# Altium PCB uicc.PcbDoc
Units mm, origin at the board's own origin, x right, y up, seen from the top; angles counter-clockwise.
Board outline 152.4 x 101.6 mm, 2 copper layers (Top Layer, Bottom Layer); 76 components, 51 nets, 244 pads, 65 vias.
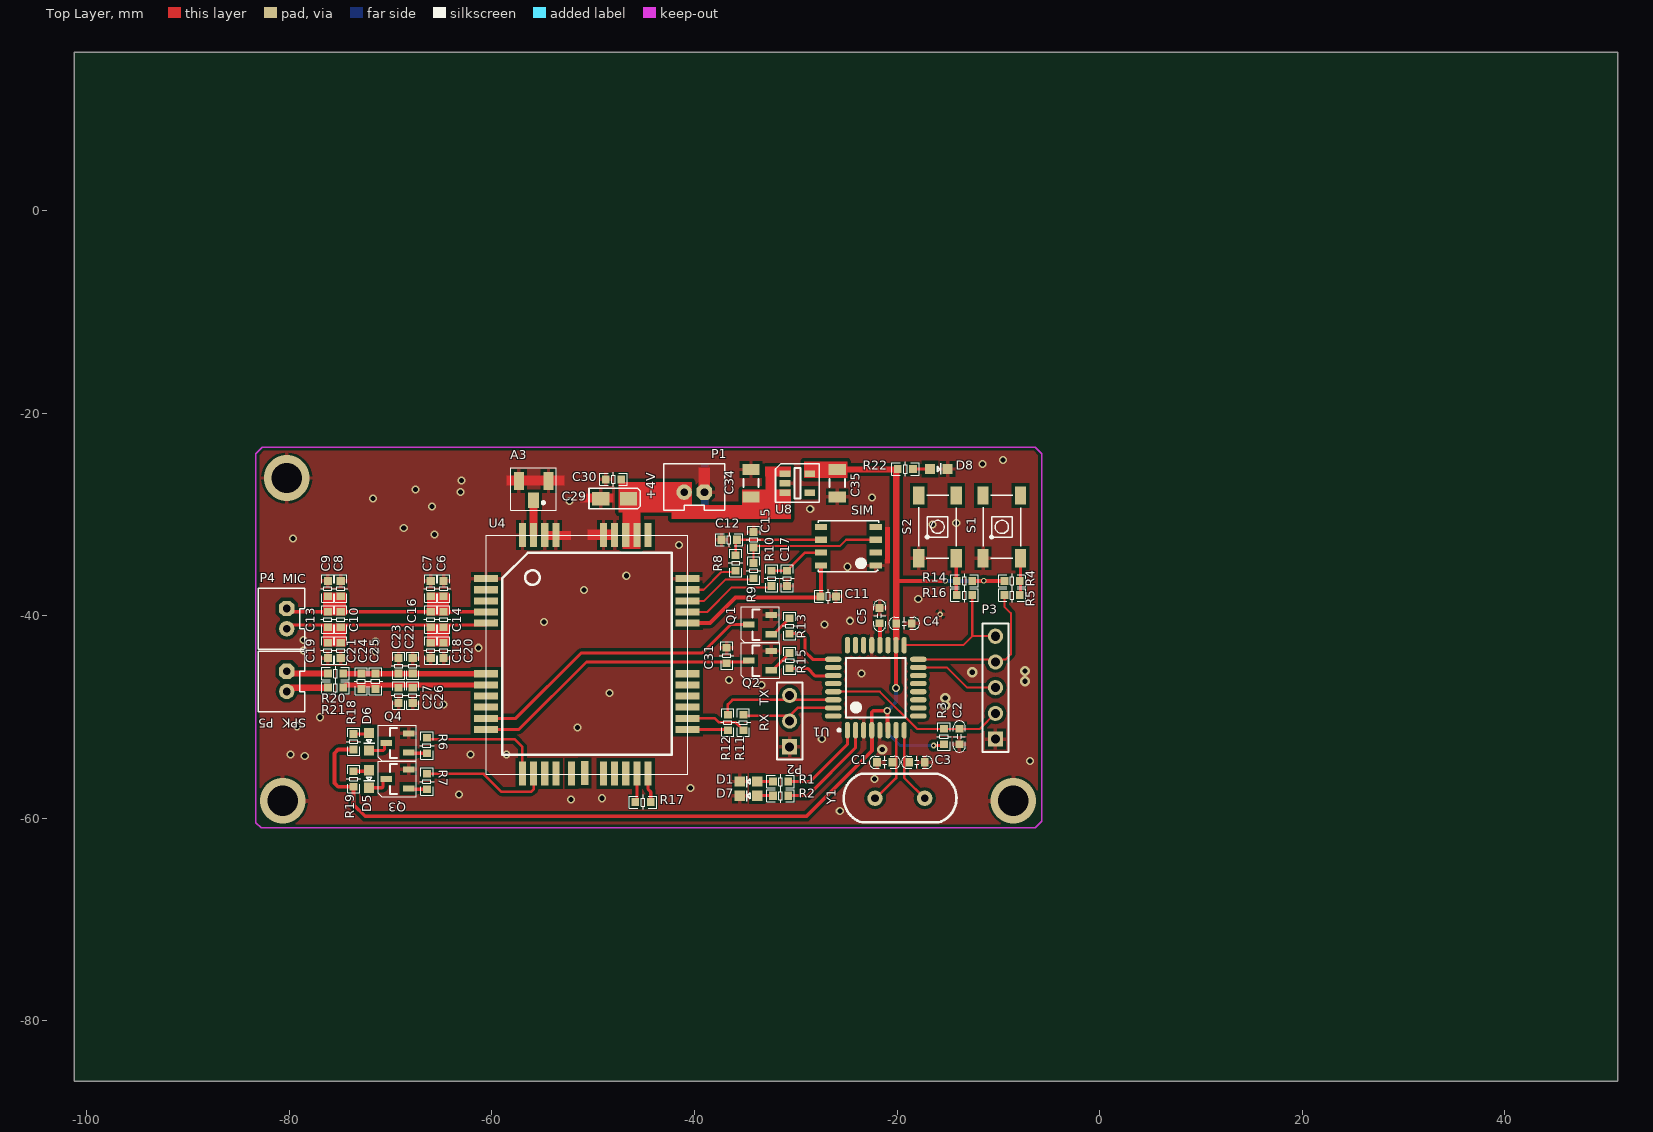
[diagram p0: Top Layer view]
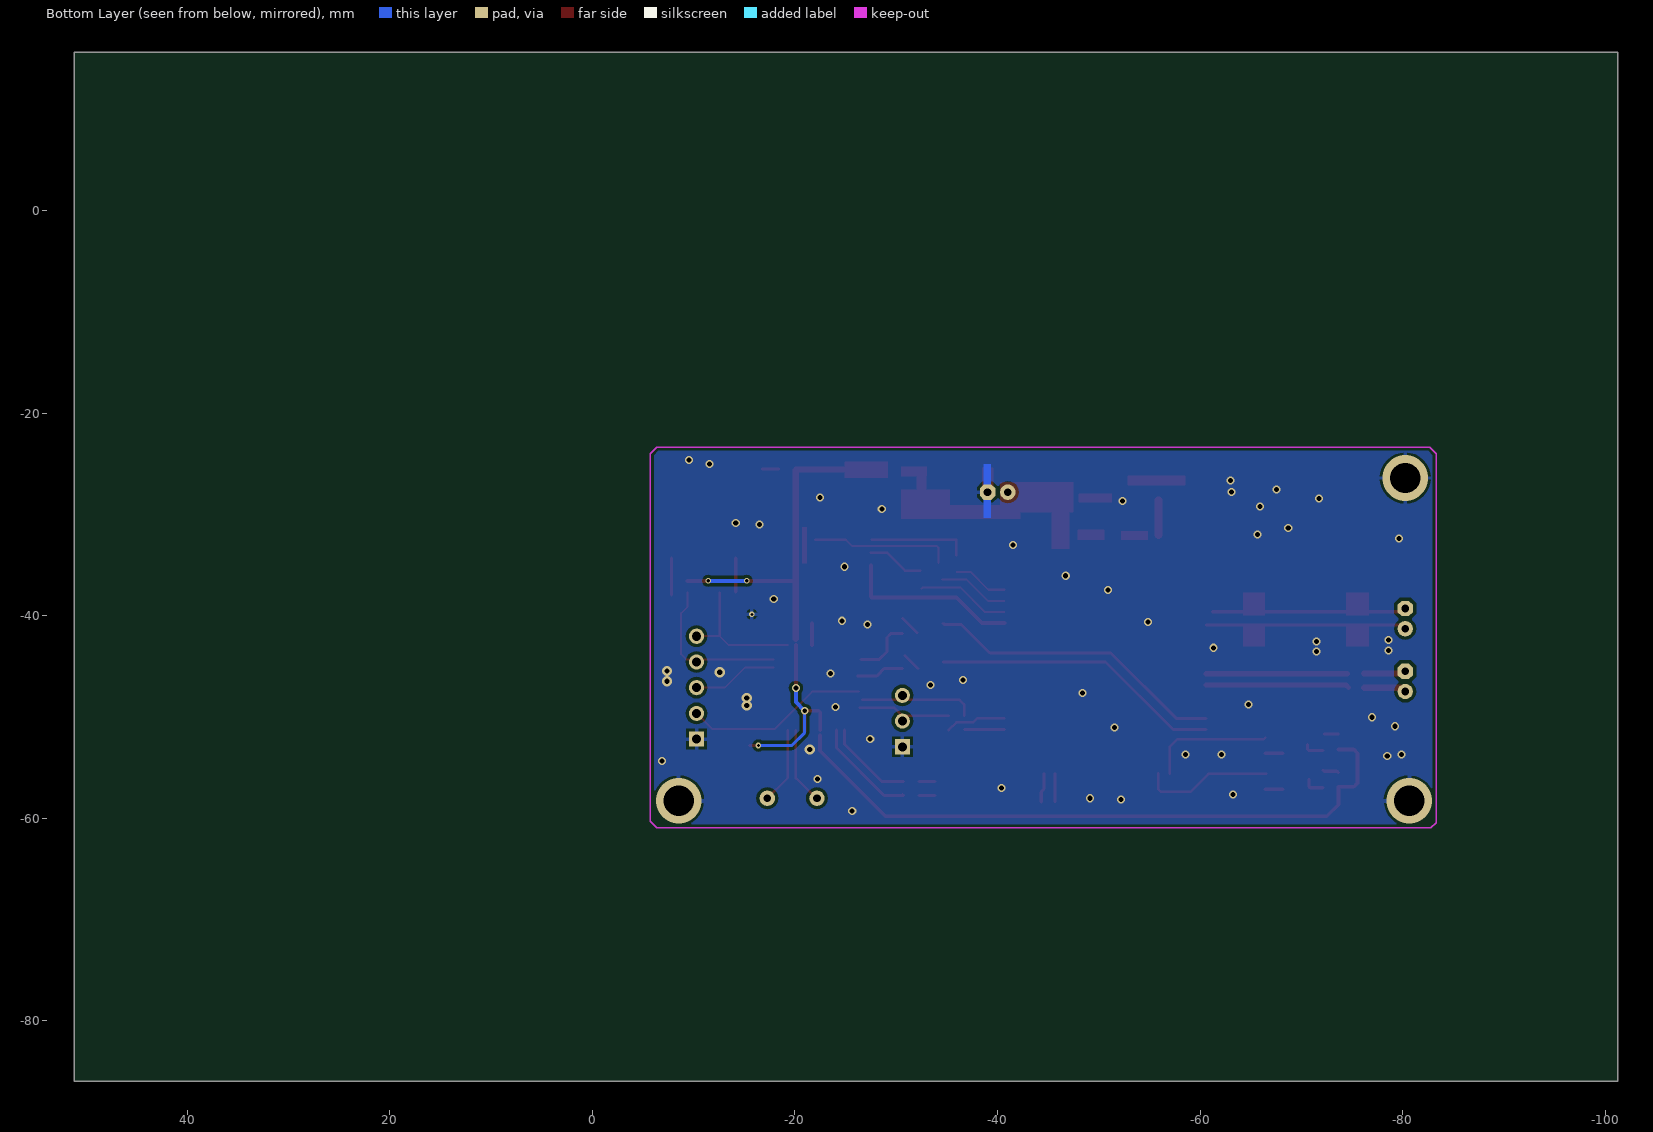
[diagram p1: Bottom Layer view, seen from below]

## Layer stack, top to bottom
Top Solder: solder mask 0.0102, Solder Resist, Dk 3.5
Top Layer: signal copper 0.0356
Dielectric1: dielectric 0.32, FR-4, Dk 4.8
Bottom Layer: signal copper 0.0356
Bottom Solder: solder mask 0.0102, Solder Resist, Dk 3.5

## Board outline
-101.241,-85.979 51.159,-85.979 51.159,15.621 -101.241,15.621

## Design rules (kind name [scope] priority, off if disabled: settings)
Clearance [All] p1 off: gap=0.305
ComponentClearance [All] p1 off: gap=0.254 collisioncheckmode=3 verticalgap=0.254 showdistances=FALSE
FabricationTestPointUsage TestPointUsage [All] p1: valid=0 allowmultiple=FALSE
FabricationTestpoint Testpoint [(IsPad And (OnTopLayer Or OnBottomLayer))] p1: side=3 testpointundercomponent=TRUE minsize=1.016 maxsize=2.54 preferedsize=1.524 minholesize=0 maxholesize=1.016 preferedholesize=0.813 testpointgrid=0.025 allowsidetop=TRUE allowsidebottom=TRUE usegrid=TRUE gridtolerance=0
HoleSize [All] p1: absolutevalues=TRUE maxlimit=5.08 minlimit=0.025 maxpercent=80.000 minpercent=20.000
PolygonConnect [All] p1: connectstyle=Relief reliefconductorwidth=0.381 reliefentries=4 polygonreliefangle="90 Angle" airgapwidth=0.254
RoutingVias [All] p1: holewidth=0.711 width=1.27 viastyle="Through Hole" minholewidth=0.254 minwidth=0.305 maxholewidth=5.08 maxwidth=7.62
SolderMaskExpansion [All] p1: expansion=0.102
Width [All] p1: maxlimit=5.08 minlimit=0.203 preferedwidth=0.305 minimp=50.000000 maximp=50.000000 favimp=50.000000
26 further rules are at their usual default settings.

## Components (designator, comment, footprint, x,y, rotation, side; value= is the part's Value field where it differs from the comment)
A3 "IPEX" IPEX -55.88,-27.432 r270 top
C1 "Cap" 0603C -21.209,-54.483 r270 top
C2 "Cap" 0603C -13.843,-51.943 r0 top
C3 "Cap" 0603C -18.034,-54.483 r90 top
C4 "Cap" 0603C -19.304,-40.767 r270 top
C5 "Cap" 0603C -21.717,-40.005 r180 top
C6 "Cap" 0603R -64.77,-37.338 r180 top
C7 "Cap" 0603R -66.04,-37.338 r180 top
C8 "Cap" 0603R -74.93,-37.338 r180 top
C9 "Cap" 0603R -76.2,-37.338 r180 top
C10 "Cap" 0603R -74.93,-40.386 r180 top
C11 "Cap" 0603R -26.797,-38.1 r270 top
C12 "Cap" 0603R -36.576,-32.512 r90 top
C13 "Cap" 0603R -76.2,-40.386 r180 top
C14 "Cap" 0603R -64.77,-40.386 r180 top
C15 "Cap" 0603R -34.163,-32.512 r180 top
C16 "Cap" 0603R -66.04,-40.386 r180 top
C17 "Cap" 0603R -30.861,-36.322 r0 top
C18 "Cap" 0603R -66.04,-43.434 r180 top
C19 "Cap" 0603R -76.2,-43.434 r180 top
C20 "Cap" 0603R -64.77,-43.434 r180 top
C21 "Cap" 0603R -74.93,-43.434 r180 top
C22 "Cap" 0603R -67.818,-44.958 r180 top
C23 "Cap" 0603R -69.215,-44.958 r180 top
C24 "Cap" 0603R -72.898,-46.482 r180 top
C25 "Cap" 0603R -71.501,-46.482 r180 top
C26 "Cap" 0603R -67.818,-47.879 r180 top
C27 "Cap" 0603R -69.215,-47.879 r180 top
C29 "Cap Pol3" C3216 -47.879,-28.448 r180 top
C30 "Cap" 0603R -48.006,-26.543 r90 top
C31 "Cap" 0603R -36.83,-43.942 r180 top
C34 "Cap" C1206 -34.417,-26.924 r90 top
C35 "Cap" C1206 -25.908,-26.924 r270 top
D1 "TEST" 0603-LED -34.671,-56.388 r180 top
D5 "WORK" 0603-LED -72.136,-52.451 r270 top
D6 "LINK" 0603-LED -72.136,-56.134 r270 top
D7 "TEST" 0603-LED -34.671,-57.785 r180 top
D8 "WORK" 0603-LED -15.875,-25.527 r0 top
P1 "BAT" PH2.0-2P -41.021,-27.813 r180 top
P2 "TTL" HDR1X3 -30.607,-52.959 r90 top
P3 "ISP" HDR1X5 -10.287,-52.197 r90 top
P4 "MIC" PH2.0-2P -80.264,-41.3 r270 top
P5 "SPK" PH2.0-2P -80.264,-47.498 r270 top
Q1 "NPN" SOT-23-NPN -33.528,-40.894 r90 top
Q2 "NPN" SOT-23-NPN -33.528,-44.45 r90 top
Q3 "NPN" SOT-23-NPN -69.342,-52.578 r90 top
Q4 "NPN" SOT-23-NPN -69.342,-56.134 r90 top
R1 "Res1" 0603R -31.496,-56.388 r270 top
R2 "Res1" 0603R -31.496,-57.785 r270 top
R3 "Res1" 0603R -15.367,-51.943 r0 top
R4 "Res1" 0603R -8.636,-36.576 r90 top
R5 "Res1" 0603R -8.636,-37.973 r270 top
R6 "Res1" 0603R -66.421,-52.832 r0 top
R7 "Res1" 0603R -66.421,-56.388 r0 top
R8 "Res1" 0603R -35.941,-34.798 r0 top
R9 "Res1" 0603R -34.163,-35.56 r0 top
R10 "Res1" 0603R -32.385,-36.322 r0 top
R11 "Res1" 0603R -35.179,-50.546 r180 top
R12 "Res1" 0603R -36.703,-50.546 r180 top
R13 "Res1" 0603R -30.607,-41.021 r0 top
R14 "Res1" 0603R -13.335,-36.576 r270 top
R15 "Res1" 0603R -30.607,-44.45 r0 top
R16 "Res1" 0603R -13.335,-37.973 r90 top
R17 "Res1" 0603R -45.085,-58.42 r270 top
R18 "Res1" 0603R -73.66,-52.451 r180 top
R19 "Res1" 0603R -73.66,-56.134 r180 top
R20 "Res1" 0603R -75.438,-45.72 r270 top
R21 "Res1" 0603R -75.438,-47.117 r270 top
R22 "Res1" 0603R -19.177,-25.527 r90 top
S1 "SW-PB" SW1 -9.652,-31.242 r90 top
S2 "SW-PB" SW1 -16.002,-31.242 r90 top
SIM "MircoSIM" VQFN8 -22.098,-35.052 r180 top (schematic designator P2)
U1 "ATmega48PA" 32A_N -22.098,-47.117 r90 top
U4 "G3524" G3524 -50.038,-37.846 r0 top
U8 "XC6219B30" SOT23-5N -29.845,-26.924 r0 top
Y1 "XTAL" 49SD -17.272,-58.039 r180 top

## Footprints (in the part's own frame and the unit in brackets; to place one, negate y for a bottom-side part, rotate by r counter-clockwise, add the part's x,y. Pads: shape width x height; smd on the part's side, far side on the other; paste and mask are expansions set on the pad)
32A_N [mm] "32-Pin Thin Quad Flat Pack 0.8 mm Pitch, IPC Medium Density"
  oval 1.65x0.508 smd: 1(-4.2,2.8) 2(-4.2,2) 3(-4.2,1.2) 4(-4.2,0.4) 5(-4.2,-0.4) 6(-4.2,-1.2) 7(-4.2,-2) 8(-4.2,-2.8) 17(4.2,-2.8) 18(4.2,-2) 19(4.2,-1.2) 20(4.2,-0.4) 21(4.2,0.4) 22(4.2,1.2) 23(4.2,2) 24(4.2,2.8)
  oval 0.508x1.65 smd: 9(-2.8,-4.2) 10(-2,-4.2) 11(-1.2,-4.2) 12(-0.4,-4.2) 13(0.4,-4.2) 14(1.2,-4.2) 15(2,-4.2) 16(2.8,-4.2) 25(2.8,4.2) 26(2,4.2) 27(1.2,4.2) 28(0.4,4.2) 29(-0.4,4.2) 30(-1.2,4.2) 31(-2,4.2) 32(-2.8,4.2)
  silkscreen extent -4.32,-2.95 2.95,3.75, body extent -3.5,-3.5 3.5,3.5, height 1.2
49SD [mil]
  round 60 hole 30: 1(0,0) 2(193,0)
  silkscreen extent -124,-95 315,94
0603-LED [mm]
  rect 1x1 smd: 1(-0.864,0) 2(0.864,0)
  silkscreen extent -0.18,-0.51 0.18,0.56
0603C [mil]
  rect 31.5x30 smd: 1(0,30) 2(0,-30)
  silkscreen extent -24,-60 24,60
0603R [mil]
  rect 31.5x30 smd: 1(0,30) 2(0,-30)
  silkscreen extent -28,-53 28,53
C1206 [mm] "Chip Capacitor, Body 3.2x1.6mm, IPC High Density"
  rect 1.1x1.7 smd: 1(-1.35,0) 2(1.35,0)
  silkscreen extent -0.4,-0.75 0.4,0.75, body extent -1.7,-0.9 1.7,0.9, height 1.3
C3216 [mm]
  rect 1.7x1.35 smd: 1(-1.375,0) 2(1.375,0)
  silkscreen extent -2.54,-1.02 2.54,1.02, body extent -1.7,-0.9 1.7,0.9, height 1.7
G3524 [mm]
  rect 2.4x0.7 smd: 1(-10.55,1.5) 2(-10.55,0.4) 3(-10.55,-0.7) 4(-10.55,-1.8) 5(-10.55,-2.9) 6(-10.55,-7.9) 7(-10.55,-9) 8(-10.55,-10.1) 9(-10.55,-11.2) 10(-10.55,-12.3) 11(-10.55,-13.4) 21(9.35,-13.4) 22(9.35,-12.3) 23(9.35,-11.2) 24(9.35,-10.1) 25(9.35,-9) 26(9.35,-7.9) 27(9.35,-2.9) 28(9.35,-1.8) 29(9.35,-0.7) 30(9.35,0.4) 31(9.35,1.5)
  rect 0.7x2.4 smd: 12(-6.95,-17.75) 13(-5.85,-17.75) 14(-4.75,-17.75) 15(-3.65,-17.75) 16(1.05,-17.75) 17(2.15,-17.75) 18(3.25,-17.75) 19(4.35,-17.75) 20(5.45,-17.75) 32(5.45,5.8) 33(4.35,5.8) 34(3.25,5.8) 35(2.15,5.8) 36(1.05,5.8) 37(-3.65,5.8) 38(-4.75,5.8) 39(-5.85,5.8) 40(-6.95,5.8) 41(-2.1,-17.75) 42(-0.8,-17.7)
  silkscreen extent -10.55,-17.8 9.35,5.8
HDR1X3 [mm] "Connector; Header; 3 Position"
  rect 1.5x1.5 hole 0.9: 1(0,0)
  round 1.5 hole 0.9: 2(2.54,0) 3(5.08,0)
  silkscreen extent -1.27,-1.27 6.35,1.27
HDR1X5 [mm] "Connector; Header; 5 Position"
  rect 1.5x1.5 hole 0.9: 1(0,0)
  round 1.5 hole 0.9: 2(2.54,0) 3(5.08,0) 4(7.62,0) 5(10.16,0)
  silkscreen extent -1.27,-1.27 11.43,1.27
IPEX [mm] "SOT23, 3-Leads, Body 3.0x2.6mm (max), Pitch 0.95mm, IPC Medium Density"
  rect 1.5x1.05 smd: 1(1.181,-0.013)
  rect 1.8x1 smd: 2(-0.724,1.46) 3(-0.724,-1.461)
  silkscreen extent -2.02,-2.25 2.17,2.24
PH2.0-2P [mil]
  oct 60x60 hole 30: 1(-78.74,0)
  round 60 hole 30: 2(0,0)
  silkscreen extent -157,-110 79,70
SOT23-5N [mm]
  rect 1.05x0.65 smd: 1(-1.225,0.95) 2(-1.225,0) 3(-1.225,-0.95) 4(1.225,-0.95) 5(1.225,0.95)
  silkscreen extent -2.16,-1.91 2.16,1.91, body extent -0.87,-1.5 0.88,1.5, height 1.1
SOT-23-NPN [mm]
  rect 0.6x1.143 smd: 1(0.95,-1.108) 2(-0.95,-1.108) 3(0,1.108)
  silkscreen extent -1.75,-1.89 1.75,1.87, body extent -1.5,-0.66 1.5,0.74, height 1.1
SW1 [mm]
  rect 1.8x1.1 smd: 1(-3.1,1.85) 2(-3.1,-1.85) 3(3.1,-1.85) 4(3.1,1.85)
  silkscreen extent -3.1,-1.85 3.1,1.85
VQFN8 [mm]
  rect 1.2x0.6 smd: 1(0,0) 2(0,-1.27) 3(0,-2.54) 4(0,-3.81) 5(5.4,-3.81) 6(5.4,-2.54) 7(5.4,-1.27) 8(5.4,0)
  silkscreen extent -0.3,-4.43 5.7,0.62

## Part data
C1 C2 C3 C4 C5 C6 C7 C8 C9 C10 C11 C12 C13 C14 C15 C16 C17 C18 C19 C20 C21 C22 C23 C24 C25 C26 C27 C30 C31 C34 C35: "Capacitor"
C29: "Polarized Capacitor (Surface Mount)"
D1 D5 D6 D7 D8: library part LED2, "Typical RED, GREEN, YELLOW, AMBER GaAs LED"
P1 P4 P5: library part "Header 2", "Header, 2-Pin"
P2: library part "Header 3", "Header, 3-Pin"
P3: library part "Header 5", "Header, 5-Pin"
Q1 Q2 Q3 Q4: library part 2N5551, "NPN General Purpose Amplifier"
R1 R2 R3 R4 R5 R6 R7 R8 R9 R10 R11 R12 R13 R14 R15 R16 R17 R18 R19 R20 R21 R22: "Resistor"
S1 S2: "Switch"
U1: library part ATmega8-16AC, "8-Bit AVR Microcontroller with 8K Bytes of In-System Programmable Flash Memory"
U8: library part LP5907
Y1: "Crystal Oscillator"

## Via types
v1: diameter 0.8, hole 0.5, Top Layer to Bottom Layer, 50 vias
v2: diameter 1, hole 0.5, Top Layer to Bottom Layer, 6 vias
v3: diameter 4.5, hole 3, Top Layer to Bottom Layer, 3 vias
v4: diameter 0.559, hole 0.305, Top Layer to Bottom Layer, 2 vias
v5: diameter 0.762, hole 0.457, Top Layer to Bottom Layer, 2 vias
v6: diameter 0.559, hole 0.33, Top Layer to Bottom Layer, 2 vias

## Nets (pads, with @x,y where several pads share a name; then routed paths per layer and width w, separated by ;. In a path a pad name is that pad's centre, name@x,y a point inside that pad or via, vN(x,y) a via of type N, cw(c..) or ccw(c..) an arc to the next point about the centre after c; other vN are vias at no path point)
+3V: C4.2 C35.1 R3.2 R4.1 R14.1 R18.1 R19.1 R22.1 U1.4 U1.6 U1.18 U8.5 | length 119.4
  Top Layer w0.305: v4(-16.383,-52.832) R3.2@-15.494,-52.832
  Top Layer w0.381: R18.1 -75.184,-53.213 -75.565,-53.594 -75.565,-56.515 -75.184,-56.896 R19.1 -73.66,-58.674 -72.517,-59.817 -28.956,-59.817 -22.479,-53.34 U1.4@-22.479,-51.816 ; U1.4 -22.498,-49.549 -22.352,-49.403 v5(-20.955,-49.403) U1.6@-20.955,-51.387 ; v5(-20.098,-47.149) U1.18 ; -20.066,-36.576 v6(-15.24,-36.576) ; R14.1 v6(-11.43,-36.576) R4.1
  Top Layer w0.635: C35.1 -20.146,-25.574 -20.066,-25.654 -20.066,-36.576 U1.18@-20.066,-42.291
  Bottom Layer w0.305: v5(-20.955,-49.403) -20.955,-51.562 -19.685,-52.832 v4(-16.383,-52.832)
  Bottom Layer w0.381: v5(-20.955,-49.403) -20.098,-48.546 v5(-20.098,-47.149) ; v6(-15.24,-36.576) v6(-11.43,-36.576)
+4.2V: C29.1 C30.2 C34.1 P1.2 U4.33 U4.34 U8.1 U8.3
GND: A3.2 A3.3 C1.2 C2.2 C3.2 C4.1 C5.2 C6.2 C7.2 C8.2 C9.2 C11.1 C12.1 C15.2 C17.2 C18.1 C19.1 C20.1 C21.1 C22.2 C23.2 C26.1 C27.1 C29.2 C30.1 C31.2 C34.2 C35.2 D1.2 D7.2 D8.2 P1.1 P2.1 P3.1 Q1.1 Q2.1 Q3.1 Q4.1 S1.1 S2.1 SIM.1 U1.3 U1.5 U1.21 U4.1 U4.31 U4.35 U4.36 U4.37 U4.38 U4.40 U8.2
  other v1: -25.654,-59.309 -52.197,-58.166 -49.149,-58.039 -63.246,-57.658 -40.386,-57.023 -22.225,-56.134 -6.858,-54.356 -78.486,-53.848 -79.883,-53.721 -62.103,-53.721 -58.547,-53.721 -27.432,-52.197 -51.562,-51.054 -79.248,-50.927 -76.962,-50.038 -24.003,-49.022 -64.77,-48.768 -48.387,-47.625 -33.401,-46.863 -36.576,-46.355 -23.495,-45.72 -71.501,-43.561 -78.613,-43.434 -61.341,-43.18 -71.501,-42.545 -78.613,-42.418 -27.178,-40.894 -54.864,-40.64 -24.638,-40.513 -17.907,-38.354 -50.927,-37.465 -46.736,-36.068 -24.892,-35.179 -41.529,-33.02 -79.629,-32.385 -65.659,-32.004 -68.707,-31.369 -16.51,-30.988 -14.152,-30.861 -14.152,-30.861 -28.575,-29.464 -65.913,-29.21 -52.324,-28.702 -71.755,-28.448 -22.479,-28.321 -63.119,-27.813 -67.564,-27.559 -62.992,-26.67 -11.557,-25.019 -9.525,-24.638
  other v2: -21.463,-53.213 -15.24,-48.895 -15.24,-48.133 -7.366,-46.482 -12.573,-45.593 -7.366,-45.466
  other v3: -80.645,-58.293 -8.509,-58.293 -80.264,-26.416
  other v4: -15.748,-39.878
GSM_PW: R13.2 U1.25 | length 5.9
  Top Layer w0.305: R13.2 -29.464,-41.783 -29.083,-42.164 -29.083,-43.561 -28.321,-44.323 U1.25@-26.543,-44.323
GSM_RST: R15.2 U1.27 | length 4.8
  Top Layer w0.305: R15.2 -29.591,-45.212 -28.829,-45.212 -28.067,-45.974 U1.27@-26.162,-45.974
GSM_RX: P2.3 R12.2 U1.30 | length 11.4
  Top Layer w0.254: R12.2@-36.703,-49.911 -36.703,-48.768 -36.252,-48.317 U1.30@-26.67,-48.317
GSM_TX: P2.2 R11.2 U1.31 | length 9.1
  Top Layer w0.254: R11.2@-35.179,-49.911 -30.607,-49.911 -29.813,-49.117 U1.31@-26.416,-49.117
LINK_LED: Q4.2 R7.2 | length 1.7
  Top Layer w0.305: Q4.2@-68.168,-57.15 R7.2
MIC_N: C6.1 C7.1 C8.1 C9.1 C10.2 C13.2 C14.2 C16.2 P4.1 U4.4 | length 18.6
  Top Layer w0.305: P4.1@-79.858,-39.624 C16.2 C14.2 U4.4@-61.214,-39.624
MIC_P: C10.1 C13.1 C14.1 C16.1 C18.2 C19.2 C20.2 C21.2 P4.2 U4.5 | length 19.4
  Top Layer w0.305: P4.2@-80.061,-40.924 U4.5@-60.613,-40.924
MISO_SW1: P3.4 R5.2 U1.16 | length 15.7
  Top Layer w0.203: U1.16 -9.265,-44.317 -8.763,-43.815 -8.763,-39.751 -9.398,-39.116 R5.2@-9.398,-37.719
MOSI: P3.3 U1.15 | length 8.4
  Top Layer w0.203: U1.15 -15.081,-45.117 -13.081,-47.117 P3.3
NetA3_1: A3.1 U1.24 U4.39 | length 3.4
  Top Layer w0.762: U4.39 A3.1@-55.888,-28.613
NetC1_1: C1.1 U1.7 Y1.2 | length 7.6
  Top Layer w0.254: Y1.2@-22.136,-58.077 -20.098,-56.039 U1.7
NetC3_1: C3.1 U1.8 Y1.1 | length 7.7
  Top Layer w0.254: U1.8 -19.298,-56.013 Y1.1@-17.145,-58.166
NetC5_1: C5.1 U1.20 | length 2.1
  Top Layer w0.381: U1.20 C5.1@-21.698,-40.767
NetC31_1: C31.1 Q2.3 U4.11 | length 28.7
  Top Layer w0.305: U4.11 -57.342,-51.246 -50.673,-44.577 Q2.3@-34.636,-44.577
NetD1_1: D1.1 R1.2 | length 1.5
  Top Layer w0.305: D1.1 R1.2
NetD5_1: D5.1 R18.2 | length 1.4
  Top Layer w0.305: R18.2 D5.1@-72.238,-51.689
NetD5_2: D5.2 Q3.3 | length 2
  Top Layer w0.305: D5.2 -70.714,-53.315 -70.612,-53.213 Q3.3@-70.612,-52.74
NetD6_1: D6.1 R19.2 | length 1.6
  Top Layer w0.305: R19.2@-73.66,-55.499 -73.533,-55.372 -72.238,-55.372 D6.1
NetD6_2: D6.2 Q4.3 | length 2.2
  Top Layer w0.305: D6.2 -70.841,-56.998 -70.739,-56.896 Q4.3@-70.739,-56.134
NetD7_1: D7.1 R2.2 | length 1.5
  Top Layer w0.305: D7.1 R2.2
NetD8_1: D8.1 R22.2 | length 1.7
  Top Layer w0.305: R22.2 D8.1
NetP5_1: P5.1 R20.2 | length 3.8
  Top Layer w0.635: P5.1@-80.042,-45.72 R20.2
NetP5_2: P5.2 R21.2 | length 3.7
  Top Layer w0.635: P5.2@-79.883,-47.117 R21.2
NetQ1_2: Q1.2 R13.1 | length 2
  Top Layer w0.305: Q1.2@-32.067,-41.719 R13.1@-30.638,-40.29
NetQ1_3: Q1.3 U4.10 | length 29.8
  Top Layer w0.305: U4.10 -57.639,-50.146 -51.181,-43.688 -39.243,-43.688 -36.449,-40.894 -34.763,-40.894 Q1.3@-34.636,-40.767
NetQ2_2: Q2.2 R15.1 | length 1.8
  Top Layer w0.305: Q2.2@-32.137,-45.218 R15.1@-30.872,-43.953
NetR1_1: R1.1 U1.1 | length 8.8
  Top Layer w0.305: R1.1 -28.575,-56.388 -24.898,-52.711 U1.1
NetR2_1: R2.1 U1.2 | length 10.5
  Top Layer w0.305: R2.1@-30.607,-57.658 R2.1 -28.829,-57.785 -24.098,-53.054 U1.2
NetR4_2: R4.2 R5.1 S1.2 | length 3.6
  Top Layer w0.305: R5.1@-7.802,-37.973 S1.2
NetR7_1: R7.1 U4.13 | length 13.1
  Top Layer w0.254: R7.1@-66.548,-55.626 -60.833,-55.626 -59.055,-57.404 -56.134,-57.404 -55.888,-57.158 U4.13
NetR8_2: R8.2 U4.30 | length 5.5
  Top Layer w0.203: U4.30 -39.097,-37.446 -37.338,-35.687 R8.2@-35.941,-35.687
NetR9_2: R9.2 U4.29 | length 7
  Top Layer w0.203: U4.29 -39.054,-38.546 -36.957,-36.449 R9.2@-34.544,-36.449
NetR10_2: R10.2 U4.28 | length 9.2
  Top Layer w0.203: U4.28 -38.757,-39.646 -36.322,-37.211 -32.639,-37.211 R10.2@-32.512,-37.338
NetR11_1: R11.1 U4.22 | length 6
  Top Layer w0.254: U4.22 -37.992,-50.146 -37.592,-50.546 -35.941,-50.546 R11.1
NetR12_1: R12.1 U4.21 | length 3.9
  Top Layer w0.305: U4.21 R12.1@-36.765,-51.246
NetR14_2: R14.2 R16.1 S2.2 | length 3.3
  Top Layer w0.305: R16.1@-14.152,-37.664 S2.2
NetR17_1: R17.1 U4.20 | length 2.9
  Top Layer w0.305: U4.20 -44.588,-57.139 -44.323,-57.404 R17.1
RST: C2.1 P3.2 R3.1 U1.29 | length 18.2
  Top Layer w0.203: U1.29 -21.698,-47.517 -18.034,-51.181 -11.811,-51.181 P3.2
SCK_SW2: P3.5 R16.2 U1.17 | length 13.7
  Top Layer w0.203: U1.17 -13.453,-42.917 -12.573,-42.037 ; R16.2@-12.573,-37.719 -12.573,-42.037 ; P3.5 -12.573,-42.037
SIM_CLK: C12.2 R8.1 SIM.6 | length 9.9
  Top Layer w0.203: C12.2@-35.941,-32.512 SIM.6@-27.559,-32.512
  Top Layer w0.254: R8.1 C12.2@-35.941,-32.512
SIM_DAT: C15.1 R9.1 SIM.3 | length 14
  Top Layer w0.203: R9.1 C15.1 -34.036,-33.147 -25.654,-33.147 -25.019,-32.512 SIM.3@-21.971,-32.512
SIM_RST: C17.1 R10.1 SIM.7 | length 5.6
  Top Layer w0.254: R10.1 C17.1 -29.083,-33.782 SIM.7
SPK_N: C22.1 C23.1 C24.2 C25.2 R20.1 U4.6 | length 14
  Top Layer w0.508: R20.1@-74.549,-45.746 U4.6
SPK_P: C24.1 C25.1 C26.2 C27.2 R21.1 U4.7 | length 14.2
  Top Layer w0.508: R21.1 -74.405,-46.846 U4.7
STAT: R6.1 U4.12 | length 12.4
  Top Layer w0.254: R6.1 -66.294,-52.197 -57.785,-52.197 -56.988,-52.994 U4.12
VDD3.0: R17.2 U4.19 | length 2.8
  Top Layer w0.305: R17.2@-45.688,-58.42 U4.19
VSIM: C11.2 SIM.8 U4.27 | length 17.2
  Top Layer w0.381: U4.27 -38.46,-40.746 -35.941,-38.227 C11.2@-27.559,-38.227 ; C11.2@-27.498,-38.1 SIM.8
WORK_LED: Q3.2 R6.2 | length 1.7
  Top Layer w0.305: Q3.2@-68.168,-53.594 R6.2
pads on no net: S1.3 S1.4 S2.3 S2.4 SIM.2 SIM.4 SIM.5 U1.9 U1.10 U1.11 U1.12 U1.13 U1.14 U1.19 U1.22 U1.23 U1.26 U1.28 U1.32 U4.2 U4.3 U4.8 U4.9 U4.14 U4.15 U4.16 U4.17 U4.18 U4.23 U4.24 U4.25 U4.26 U4.32 U4.41 U4.42 U8.4

## Polygon pours and split planes (outlines as drawn)
GND on Bottom Layer "GND_L02_P020" (solid, remove dead copper, pour order 20): -89.281,-20.32 -2.413,-20.32 -1.397,-19.304 -1.143,-19.558 -1.143,-65.024 -84.963,-65.024 -85.598,-65.659
GND on Top Layer "GND_L01_P022" (solid, remove dead copper, pour order 22): -86.233,-21.336 -85.979,-21.082 -4.445,-21.082 -4.445,-66.802 -4.318,-66.929 -8.509,-62.738 -86.868,-62.738

## Keep-outs
Keep-Out Layer:
  lines w0.127: -83.312,-60.452 -83.312,-24.003 -82.677,-23.368 -6.35,-23.368 -5.715,-24.003 -5.715,-60.325 -6.35,-60.96 -82.804,-60.96 -83.312,-60.452

## Other copper
Top Layer:
  rectangle net GND: -21.209,-34.861 -20.7,-31.242
  rectangle net GND: -39.624,-28.067 -38.481,-25.4
  rectangle net GND: -58.547,-27.178 -52.832,-26.162
  rectangle net GND: -51.308,-28.829 -48.006,-27.94
  rectangle net GND: -50.546,-32.512 -47.879,-31.496
  rectangle net GND: -54.864,-32.512 -52.197,-31.623
  rectangle net +3V: -29.21,-26.416 -24.892,-24.765
  rectangle net +4.2V: -33.02,-26.289 -30.48,-25.273
  rectangle net +4.2V: -33.009,-28.194 -32.004,-25.527
  rectangle net +4.2V: -33.147,-30.48 -30.48,-27.559
  rectangle net +4.2V: -35.306,-30.48 -32.893,-27.559
  rectangle net +4.2V: -42.291,-30.48 -33.02,-29.083
  rectangle net +4.2V: -47.117,-33.401 -45.339,-27.686
  rectangle net +4.2V: -47.498,-29.845 -40.259,-26.797
  rectangle net MIC_P: -76.708,-43.053 -74.422,-40.767
  rectangle net MIC_N: -76.708,-40.005 -74.422,-37.719
  rectangle net MIC_N: -66.421,-40.005 -64.262,-37.719
  rectangle net MIC_P: -66.421,-43.053 -64.262,-40.767
  text "String" at 17.145,40.488 h1.52
  text "String" at 17.145,40.488 h1.52
Bottom Layer:
  rectangle net GND: -39.37,-30.353 -38.608,-25.019

## Silkscreen, mask and mechanical layers (free items; w line width, h text height)
Top Overlay:
  text "+4V" at -43.561,-28.575 h1.52 r90
  text "MIC" at -80.645,-37.084 h1.52
  text "TX" at -32.385,-48.895 h1.52 r90
  text "SPK" at -78.359,-49.911 h1.52 r180
  text "RX" at -32.385,-51.435 h1.52 r90